# Altium PCB PCB1.PcbDoc
Units mil, origin at the board's own origin, x right, y up, seen from the top; angles counter-clockwise.
Board outline 4910 x 1475 mil, 2 copper layers (Top Layer, Bottom Layer); 17 components, 15 nets, 51 pads, 0 vias.
Unrouted connection lines stored in the file: 36.
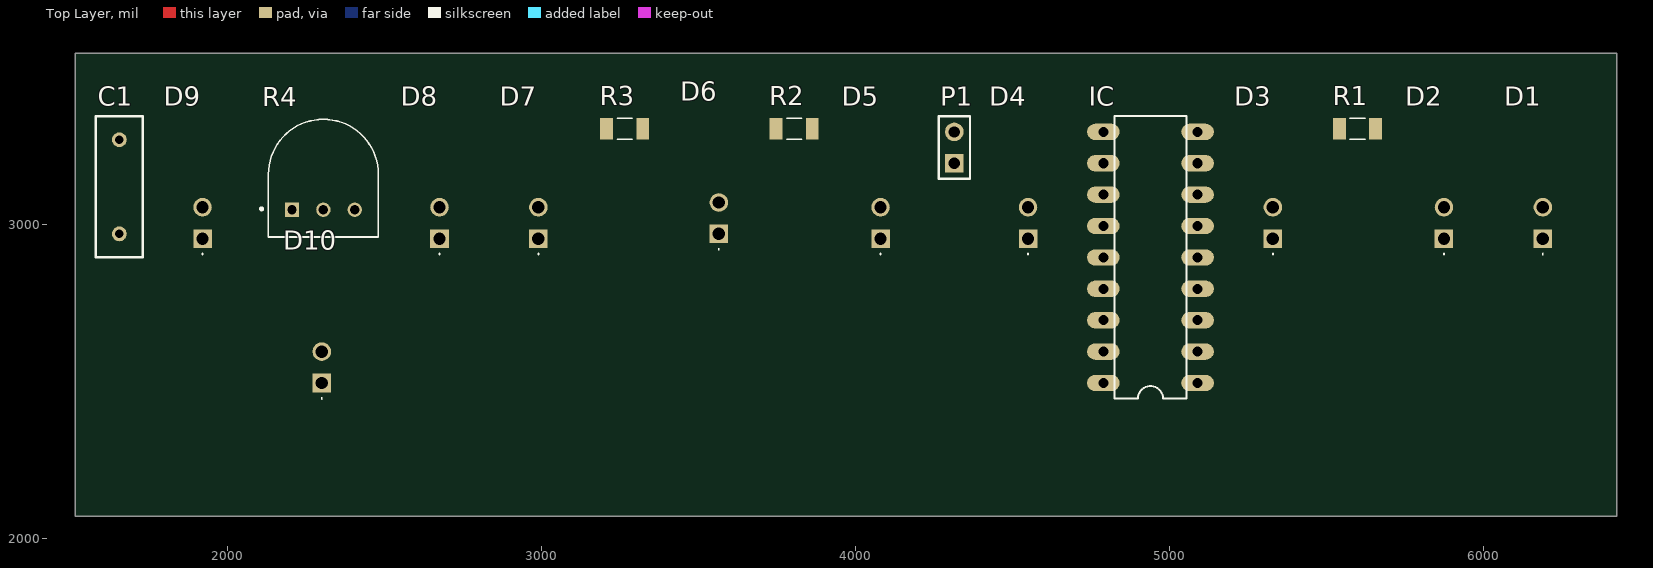
[diagram p0: Top Layer view]
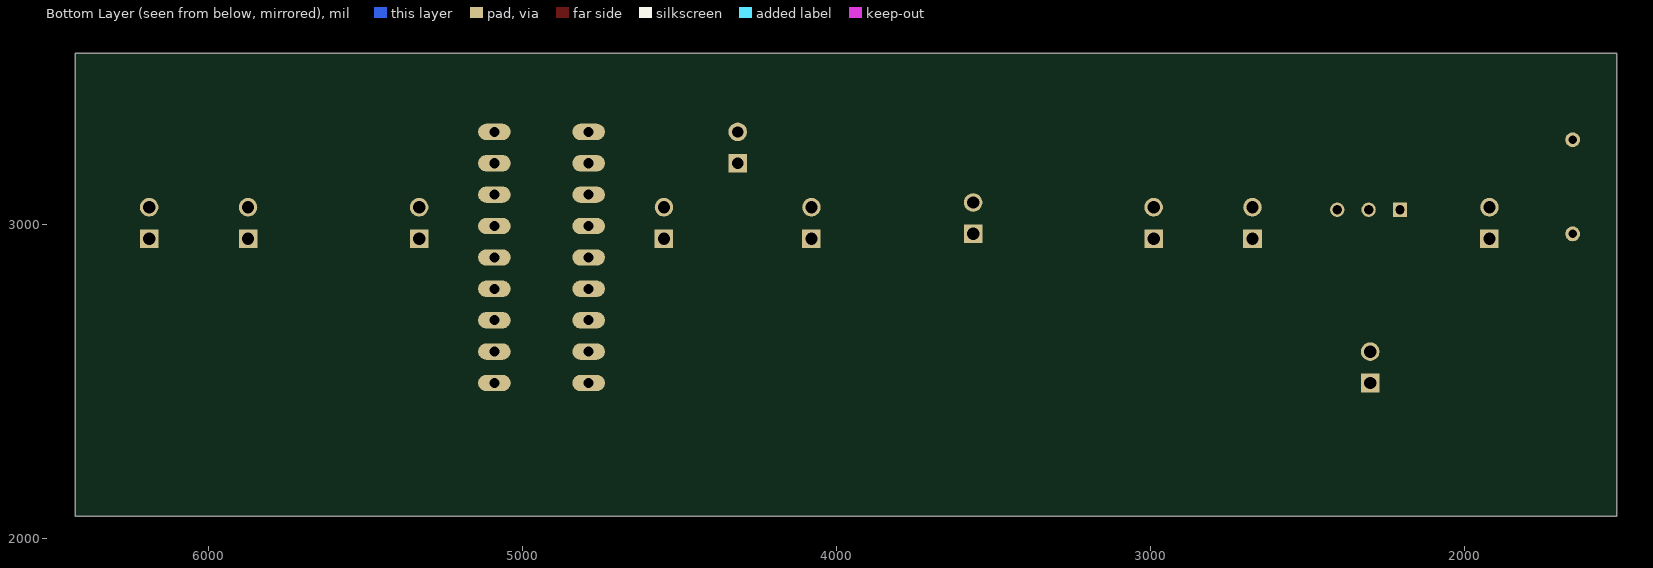
[diagram p1: Bottom Layer view, seen from below]

## Layer stack, top to bottom
Top Solder: solder mask 0.4, Solder Resist, Dk 3.5
Top Layer: signal copper 1.4
Dielectric 1: dielectric 12.6, FR-4, Dk 4.8
Bottom Layer: signal copper 1.4
Bottom Solder: solder mask 0.4, Solder Resist, Dk 3.5

## Board outline
1515,2070 6425,2070 6425,3545 1515,3545

## Design rules (kind name [scope] priority, off if disabled: settings)
Clearance [All] p1: gap=10 ignorepadtopadclearanceinfootprint=FALSE except(0: Arc-Hole Track-Hole SMDPad-Hole THPad-Hole Via-Hole Fill-Hole Poly-Hole Region-Hole Text-Hole)
PolygonConnect [All] p1: connectstyle=Relief reliefconductorwidth=10 reliefentries=4 polygonreliefangle="90 Angle" airgapwidth=10
RoutingVias [All] p1: holewidth=28 width=50 viastyle="Through Hole" minholewidth=28 minwidth=50 maxholewidth=28 maxwidth=50
SolderMaskExpansion [All] p1: expansion=4 istentingtop=FALSE
Width [All] p1: maxlimit=10 minlimit=10 preferedwidth=10
30 further rules are at their usual default settings.

## Components (designator, comment, footprint, x,y, rotation, side; value= is the part's Value field where it differs from the comment)
C1 "Cap" RAD-0.3 1655,3120 r90 top value=100pF
D1 "15400385A3590" 15400385A3590 6190,2955 r90 top
D2 "15400385A3590" 15400385A3590 5875,2955 r90 top
D3 "15400385A3590" 15400385A3590 5330,2955 r90 top
D4 "15400385A3590" 15400385A3590 4550,2955 r90 top
D5 "15400385A3590" 15400385A3590 4080,2955 r90 top
D6 "15400385A3590" 15400385A3590 3565,2970 r90 top
D7 "15400385A3590" 15400385A3590 2990,2955 r90 top
D8 "15400385A3590" 15400385A3590 2675,2955 r90 top
D9 "15400385A3590" 15400385A3590 1920,2955 r90 top
D10 "15400385A3590" 15400385A3590 2300,2495 r90 top
IC "LM3914N" DIL18 4940,2895 r90 top
P1 "Header 2" HDR1X2 4315,3195 r90 top
R1 "CRG1206F1K0/10" RESC3115X65N 5600,3305 r0 top
R2 "CRG1206F1K0/10" RESC3115X65N 3805,3305 r0 top
R3 "CRG1206F1K0/10" RESC3115X65N 3265,3305 r0 top
R4 "3352T-1-200" TRIM_3352T-1-200 2305,3160 r0 top

## Footprints (in the part's own frame and the unit in brackets; to place one, negate y for a bottom-side part, rotate by r counter-clockwise, add the part's x,y. Pads: shape width x height; smd on the part's side, far side on the other; paste and mask are expansions set on the pad)
15400385A3590 [mm]
  rect 1.5x1.5 hole 1: 1(0,0)
  round 1.5 hole 1: 2(2.54,0)
  silkscreen extent -1.3,-0.05 -1.2,0.05, body extent -10,-3.38 10,3.38, height 5.8
DIL18 [mil]
  oval 52x104 hole 32: 1(-400,-150) 2(-300,-150) 3(-200,-150) 4(-100,-150) 5(0,-150) 6(100,-150) 7(200,-150) 8(300,-150) 9(400,-150) 10(400,150) 11(300,150) 12(200,150) 13(100,150) 14(0,150) 15(-100,150) 16(-200,150) 17(-300,150) 18(-400,150)
  silkscreen extent -450,-115 450,115
HDR1X2 [mm] "Connector; Header; 2 Position"
  rect 1.5x1.5 hole 0.9: 1(0,0)
  round 1.5 hole 0.9: 2(2.54,0)
  silkscreen extent -1.27,-1.27 3.81,1.27
RAD-0.3 [mm] "Radial Cap, Thru-Hole; 2 Leads; 0.3 in Pin Spacing"
  round 1.2 hole 0.7: 1(-3.81,0) 2(3.81,0)
  silkscreen extent -5.71,-1.91 5.71,1.91
RESC3115X65N [mm]
  rect 1.05x1.72 smd: 1(-1.46,0) 2(1.46,0)
  silkscreen extent -0.62,-0.85 0.62,0.85, body extent -1.55,-0.77 1.55,0.77, height 0.65
TRIM_3352T-1-200 [mm]
  rect 1.16x1.16 hole 0.76: 1(-2.54,-2.87)
  round 1.16 hole 0.76: 2(0,-2.87) 3(2.54,-2.87)
  silkscreen extent -5.1,-5.08 4.44,4.44, body extent -4.44,-5.08 4.44,4.44, height 4.32

## Part data
C1: "Capacitor", LatestRevisionDate=17-Jul-2002, LatestRevisionNote="Re-released for DXP Platform.", PackageDescription="Radial Cap, Thru-Hole; 2 Leads; 0.3 in Pin Spacing", PackageReference=RAD-0.3, Published=8-Jun-2000, Publisher="Altium Limited"
D1 D2 D3 D4 D5 D6 D7 D8 D9 D10: "WURTH ELEKTRONIK - 15400385A3590 - Infrared Emitter, 850 nm, 35 , T-1 (3mm), 60 mW/Sr", Manufacturer_Name="Wurth Elektronik", Mouser Part Number=710-15400385A3590, Datasheet Link=https://www.we-online.com/katalog/datasheet/15400385A3590.pdf, Geometry.Height=10.9mm, Manufacturer_Part_Number=15400385A3590, Mouser Price/Stock=https://www.mouser.co.uk/ProductDetail/Wurth-Elektronik/15400385A3590?qs=5aG0NVq1C4yszs1ddn0oOg%3D%3D
IC: "LED Lighting Drivers", Package=None, Availability=Unavailable, MF="Texas Instruments", MP=LM3914N, Price=None, SnapEDA_Link=https://www.snapeda.com/parts/LM3914N/Texas%20Instruments/view-part/4652973/?ref=snap
P1: "Header, 2-Pin", LatestRevisionDate=17-Jul-2002, LatestRevisionNote="Re-released for DXP Platform.", Publisher="Altium Limited"
R1 R2 R3: "Res KalÄ±n Film 1206 1K Ohm 1% 1 / 4W Â± 100ppm / Â° C KalÄ±plÄ± SMD SMD", Package=1206, Power_Rating=".25 W", Resistance=1K, Tolerance=1%, Voltage_Rating="200 V", Availability=Warning, EU_RoHS_Compliance="Compliant with Exemptions", MF="TE Connectivity", MP=CRG1206F1K0/10, Price=None, Purchase-URL=https://pricing.snapeda.com/search/part/CRG1206F1K0/10/?ref=eda, SnapEDA_Link=https://www.snapeda.com/parts/CRG1206F1K0/10/TE%20Connectivity%20Passive%20Product/view-part/981079/?ref=snap
R4: "20 Ohms 0.5W, 1/2W Through Hole Thumbwheel Potentiometer Top Adjustment", Package="3352T-3 Bourns", Availability="In Stock", Check_prices=https://www.snapeda.com/parts/3352T-1-200/Bourns/view-part/?ref=eda, MF=Bourns, MP=3352T-1-200, Price=None, Purchase-URL=https://pricing.snapeda.com/search/part/3352T-1-200/?ref=eda, SnapEDA_Link=https://www.snapeda.com/parts/3352T-1-200/Bourns/view-part/?ref=snap

## Nets (pads, with @x,y where several pads share a name; then routed paths per layer and width w, separated by ;. In a path a pad name is that pad's centre, name@x,y a point inside that pad or via, vN(x,y) a via of type N, cw(c..) or ccw(c..) an arc to the next point about the centre after c; other vN are vias at no path point)
GND: C1.1 IC.2 IC.4 IC.8 P1.2 R1.1 R3.1
NetD1_1: D1.1 IC.10
NetD2_1: D2.1 IC.11
NetD3_1: D3.1 IC.12
NetD4_1: D4.1 IC.13
NetD5_1: D5.1 IC.14
NetD6_1: D6.1 IC.15
NetD7_1: D7.1 IC.16
NetD8_1: D8.1 IC.17
NetD9_1: D9.1 IC.18
NetD10_1: D10.1 IC.1
NetIC_5: IC.5 R2.2 R3.2
NetIC_6: IC.6 IC.7 R1.2
NetR2_1: R2.1 R4.1 R4.2
Vcc: C1.2 D1.2 D2.2 D3.2 D4.2 D5.2 D6.2 D7.2 D8.2 D9.2 D10.2 IC.3 IC.9 P1.1 R4.3